# EAGLE board neural_network (EAGLE 9.0.0)

Size 119 x 60 mm. Coordinates in mm from the lower left corner, seen from the top.
Outline: 0,0 119,0 119,60 0,60 0,0
Copper layers (1*16): Top 0.035mm / dielectric 1.5mm / Bottom 0.035mm
Design rules "default": minimum track width 6mil, minimum drill 0.35mm, track to track 6mil, track to pad 6mil, pad to pad 6mil, via to via 6mil, smd to smd 6mil, copper to edge 40mil, drill to drill 6mil, minimum pad ring 10mil, minimum via ring 8mil, stop-mask expansion 4mil, vias tented up to drill 0mil, thermal gap 10mil

## Footprints (pad centres in the part's own frame; a part is rotated, then mirrored left to right if it is on the bottom)
C0805 = smd 1.3 x 1.5: 1 -0.95,0; 2 0.95,0
153CLV-0605 = smd 3.5 x 1.6: + 2.7,0; - -2.7,0
DO214AA = smd 1.8 x 2.2: A 2.55,0; C -2.55,0
SOT23-5 = smd 0.69 x 0.99: 1 -0.95,-1.29; 2 0,-1.29; 3 0.95,-1.29; 4 0.95,1.3; 5 -0.95,1.3
SML1206 = smd 1.5 x 1.5: A 1.75,0; C -1.75,0
M0805 = smd 1.3 x 1.6: 1 -0.95,0; 2 0.95,0
12WSON = smd 0.28 x 0.5: 1 -1.25,-0.95; 2 -0.75,-0.95; 3 -0.25,-0.95; 4 0.25,-0.95; 5 0.75,-0.95; 6 1.25,-0.95; 7 1.25,0.95; 8 0.75,0.95; 9 0.25,0.95; 10 -0.25,0.95; 11 -0.75,0.95; 12 -1.25,0.95 | smd 2.2 x 0.9: TH 0,0

## Placement (x,y rotation side)
C1  100n  [C0805]  23,44 270 top
C2  10uF  [C0805]  20,44 270 top
C3  100n  [C0805]  11,32 0 top
C4  100n  [C0805]  11,28 0 top
C5  100n  [C0805]  28,32 0 top
C6  100n  [C0805]  28,24 0 top
C7  100n  [C0805]  42,31 0 top
C8  100n  [C0805]  42,25 0 top
C9  22uF  [153CLV-0605]  15,44 90 top
C10  100n  [C0805]  6,14 180 top
C11  100n  [C0805]  24,6 0 top
C12  100n  [C0805]  31,9 0 top
C13  100n  [C0805]  45,13 0 top
D1  [DO214AA]  9,45 270 top
IC1  74AHC1G14DBV  [SOT23-5]  19,35 270 top
IC2  74AHC1G14DBV  [SOT23-5]  19,27 270 top
IC3  74AHC1G14DBV  [SOT23-5]  33,35 270 top
IC4  74AHC1G14DBV  [SOT23-5]  33,27 270 top
IC5  74AHC1G14DBV  [SOT23-5]  47,35 270 top
IC6  74AHC1G14DBV  [SOT23-5]  47,27 270 top
IC7  74AHC1G14DBV  [SOT23-5]  13,11 90 top
IC8  74AHC1G14DBV  [SOT23-5]  24,11 90 top
IC9  74AHC1G14DBV  [SOT23-5]  33,12 90 top
IC10  74AHC1G14DBV  [SOT23-5]  53,10 90 top
LED1  [SML1206]  20,31 0 top
LED2  [SML1206]  20,23 0 top
LED3  [SML1206]  34,31 0 top
LED4  [SML1206]  34,23 0 top
LED5  [SML1206]  47,31 0 top
LED6  [SML1206]  47,23 0 top
R1  1M  [M0805]  15,34 90 top
R2  4k7  [M0805]  24,32 90 top
R3  1M  [M0805]  15,26 90 top
R4  4k7  [M0805]  24,24 90 top
R5  1M  [M0805]  28,35 180 top
R6  4k7  [M0805]  38,32 90 top
R7  1M  [M0805]  28,27 180 top
R8  4k7  [M0805]  38,24 90 top
R9  4k7  [M0805]  51,32 90 top
R10  4k7  [M0805]  51,24 90 top
R11  1M  [M0805]  42,35 180 top
R12  1M  [M0805]  42,28 180 top
R13  1M  [M0805]  11,36 180 top
R14  1M  [M0805]  11,25 180 top
R15  1M  [M0805]  5,8 180 top
R16  1M  [M0805]  24,14 0 top
R17  1M  [M0805]  31,15 0 top
R18  1M  [M0805]  45,16 0 top
R19  1M  [M0805]  12,7 0 top
R20  1M  [M0805]  30,6 0 top
R21  1M  [M0805]  37,9 0 top
R22  1M  [M0805]  44,7 0 top
R23  4k7  [M0805]  35,50 0 top
U1  DRV8836  [12WSON]  34,44 270 top

## Library data of the parts
C1-C13 R1-R23 = resistor
D1 = diode
IC1-IC10 = 74xx-little-de
LED1-LED6 = led
U1 = balto

## Nets
B_OUT_0: C4.1 IC1.4 R2.2 R5.2 U1.10
B_OUT_1: C3.1 IC2.4 R4.2 R7.2 U1.9
GND: C1.2 C2.2 C5.1 C6.1 C7.1 C8.1 C9.- IC1.3 IC2.3 IC3.3 IC4.3 IC5.3 IC6.3 IC7.3 IC8.3 IC9.3 IC10.3 LED1.C LED2.C LED3.C LED4.C LED5.C LED6.C R1.1 R3.1 R15.1 R16.1 R17.1 R18.1 U1.11 U1.TH
IN_0: R13.2
IN_1: R14.2
N$1: C1.1 C2.1 C9.+ D1.C IC1.5 IC2.5 IC3.5 IC4.5 IC5.5 IC6.5
N$2: C3.2 IC1.2 R1.2 R13.1
N$3: C5.2 IC3.2 R5.1
N$4: C4.2 IC2.2 R3.2 R14.1
N$5: LED1.A R2.1
N$6: LED3.A R6.1
N$7: LED2.A R4.1
N$8: C6.2 IC4.2 R7.1
N$9: LED4.A R8.1
N$10: C7.2 IC5.2 R11.1
N$11: LED5.A R9.1
N$12: C8.2 IC6.2 R12.1
N$13: LED6.A R10.1
N$14: C10.2 IC7.2 R15.2 R19.1
N$15: C10.1
N$16: IC7.4
N$17: C11.2 IC8.2 R16.2 R20.1
N$18: C11.1
N$19: IC8.4
N$20: C12.2 IC9.2 R17.2 R21.1
N$21: C12.1
N$22: IC9.4
N$23: C13.2 IC10.2 R18.2 R22.1
N$24: C13.1
N$25: IC10.4
N$26: R19.2
N$27: R20.2
N$28: R21.2
N$29: R22.2
N$32: R23.2 U1.12
N$33: U1.3
N$36: U1.2
N$37: U1.4
N$38: U1.5
S0_OUT_0: IC3.4 R6.2 R11.2 U1.8
S0_OUT_1: IC4.4 R8.2 R12.2 U1.7
S1_OUT_0: IC5.4 R9.2
S1_OUT_1: IC6.4 R10.2
VCC: D1.A IC7.5 IC8.5 IC9.5 IC10.5 U1.1

## Tracks (layer width: path | path; a pad name or v marks a point on that pad's centre or on a via)
B_OUT_0  (4 unrouted)
B_OUT_1  (4 unrouted)
GND  (30 unrouted)
N$1  (9 unrouted)
N$2  (3 unrouted)
N$3  (2 unrouted)
N$4  (3 unrouted)
N$5  (1 unrouted)
N$6  (1 unrouted)
N$7  (1 unrouted)
N$8  (2 unrouted)
N$9  (1 unrouted)
N$10  (2 unrouted)
N$11  (1 unrouted)
N$12  (2 unrouted)
N$13  (1 unrouted)
N$14  (3 unrouted)
N$17  (3 unrouted)
N$20  (3 unrouted)
N$23  (3 unrouted)
N$32  (1 unrouted)
S0_OUT_0  (3 unrouted)
S0_OUT_1  (3 unrouted)
S1_OUT_0  (1 unrouted)
S1_OUT_1  (1 unrouted)
VCC  (5 unrouted)